# Altium PCB FLATSAT.PcbDoc (part 1 of 2)
Units mil, origin at the board's own origin, x right, y up, seen from the top; angles counter-clockwise.
Board outline 6000 x 4000 mil, 2 copper layers (Top Layer, Bottom Layer); 608 components, 657 nets, 2575 pads, 7 vias.
Unrouted connection lines stored in the file: 1377.
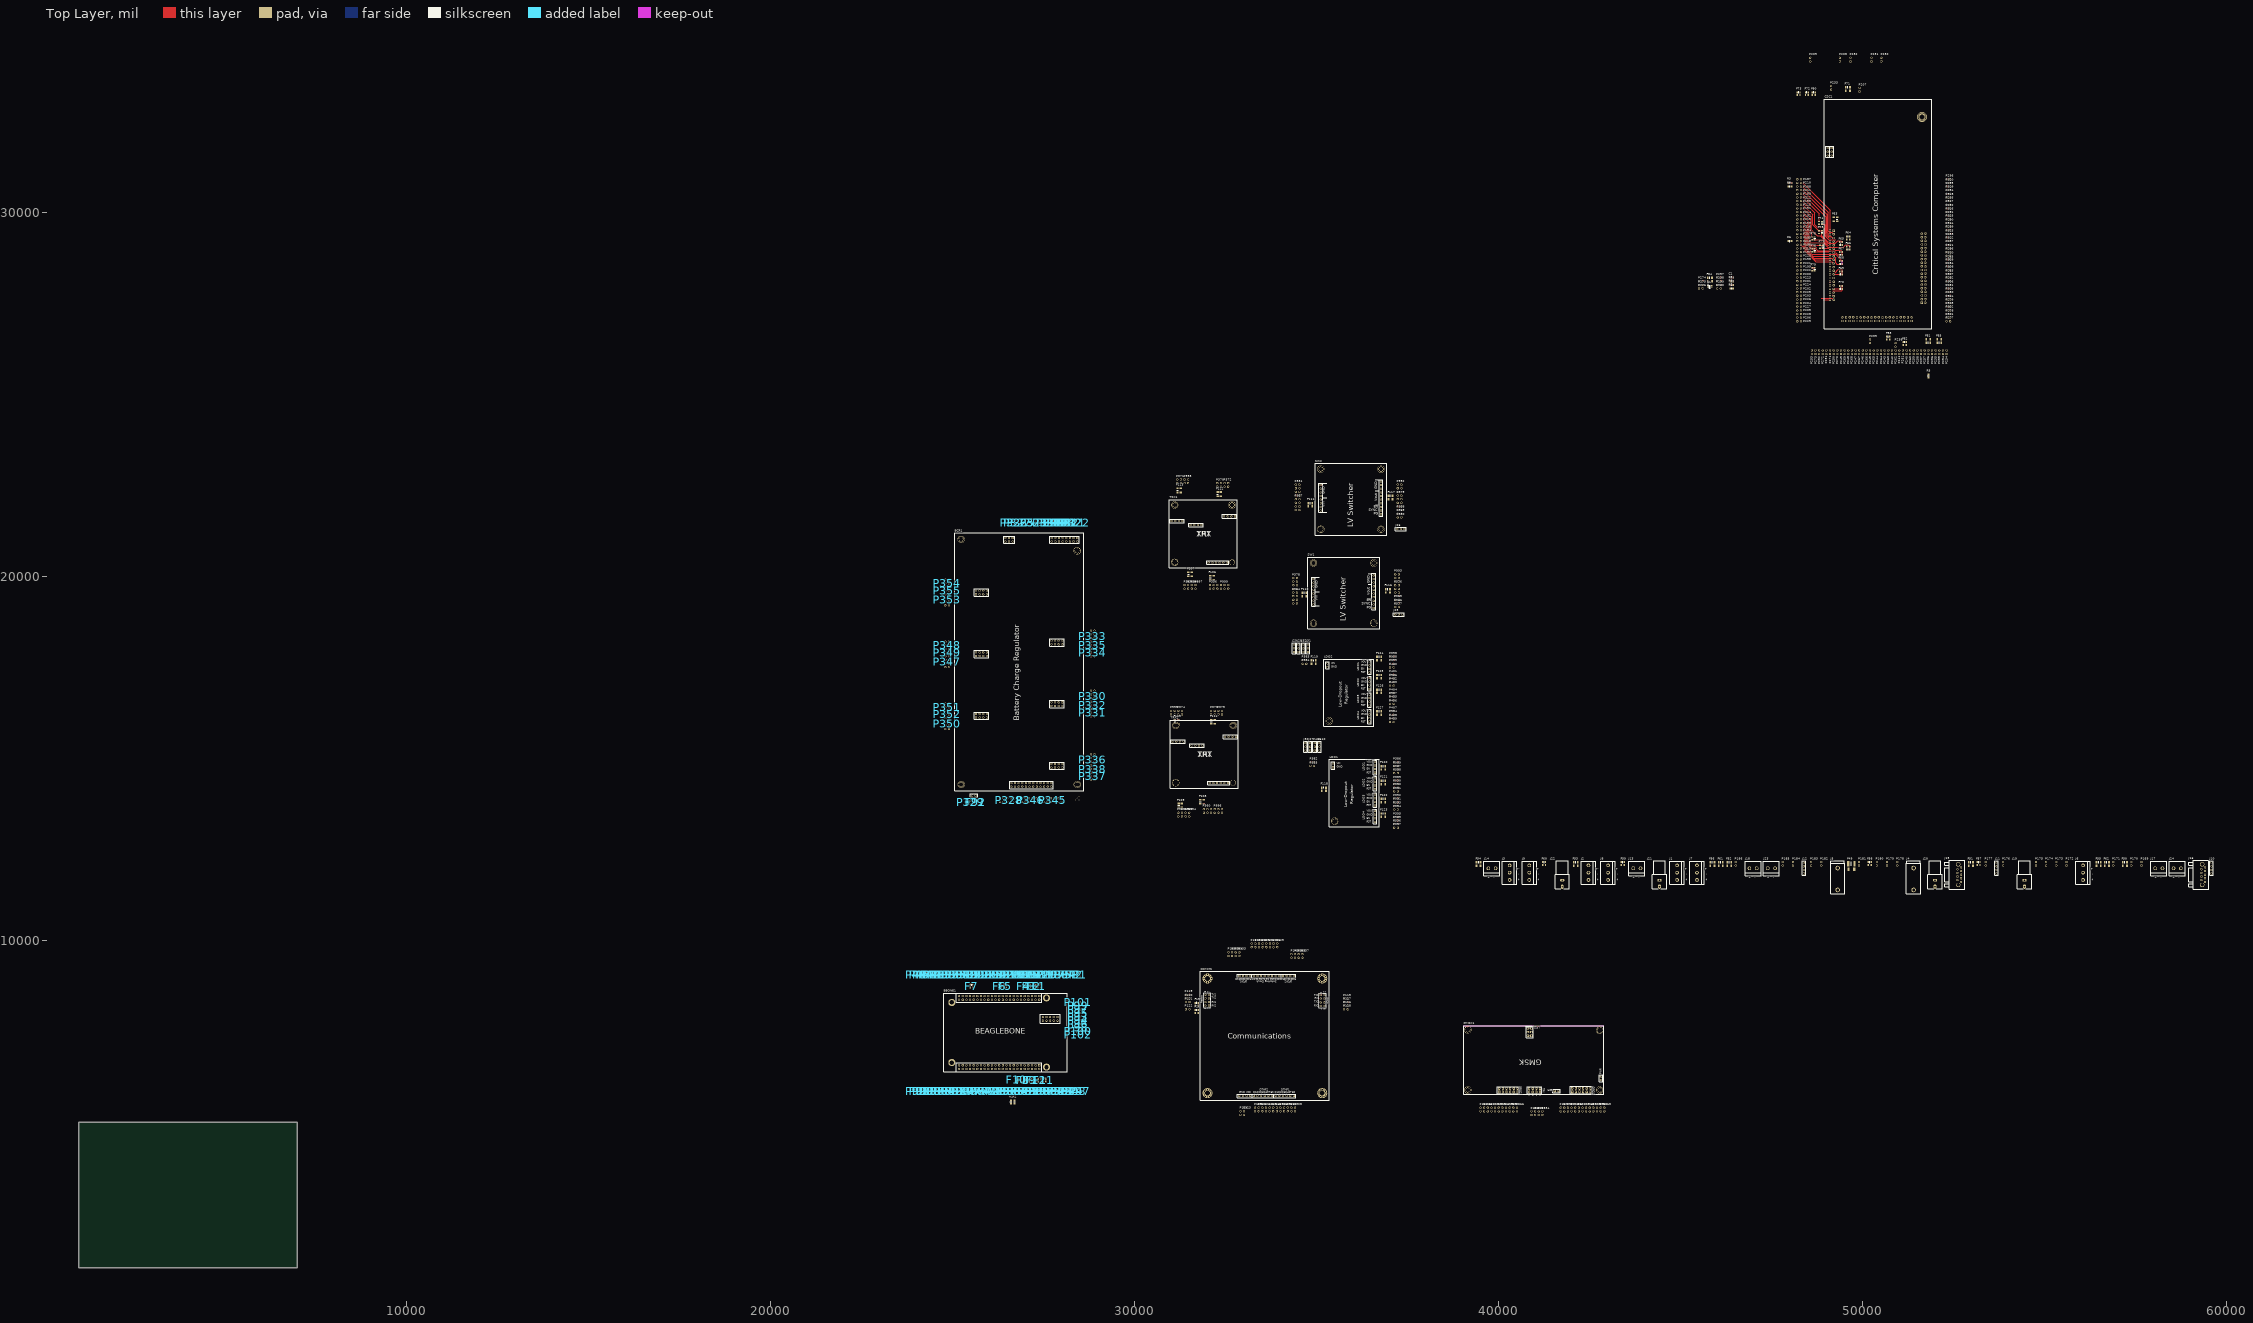
[diagram p0: Top Layer view]
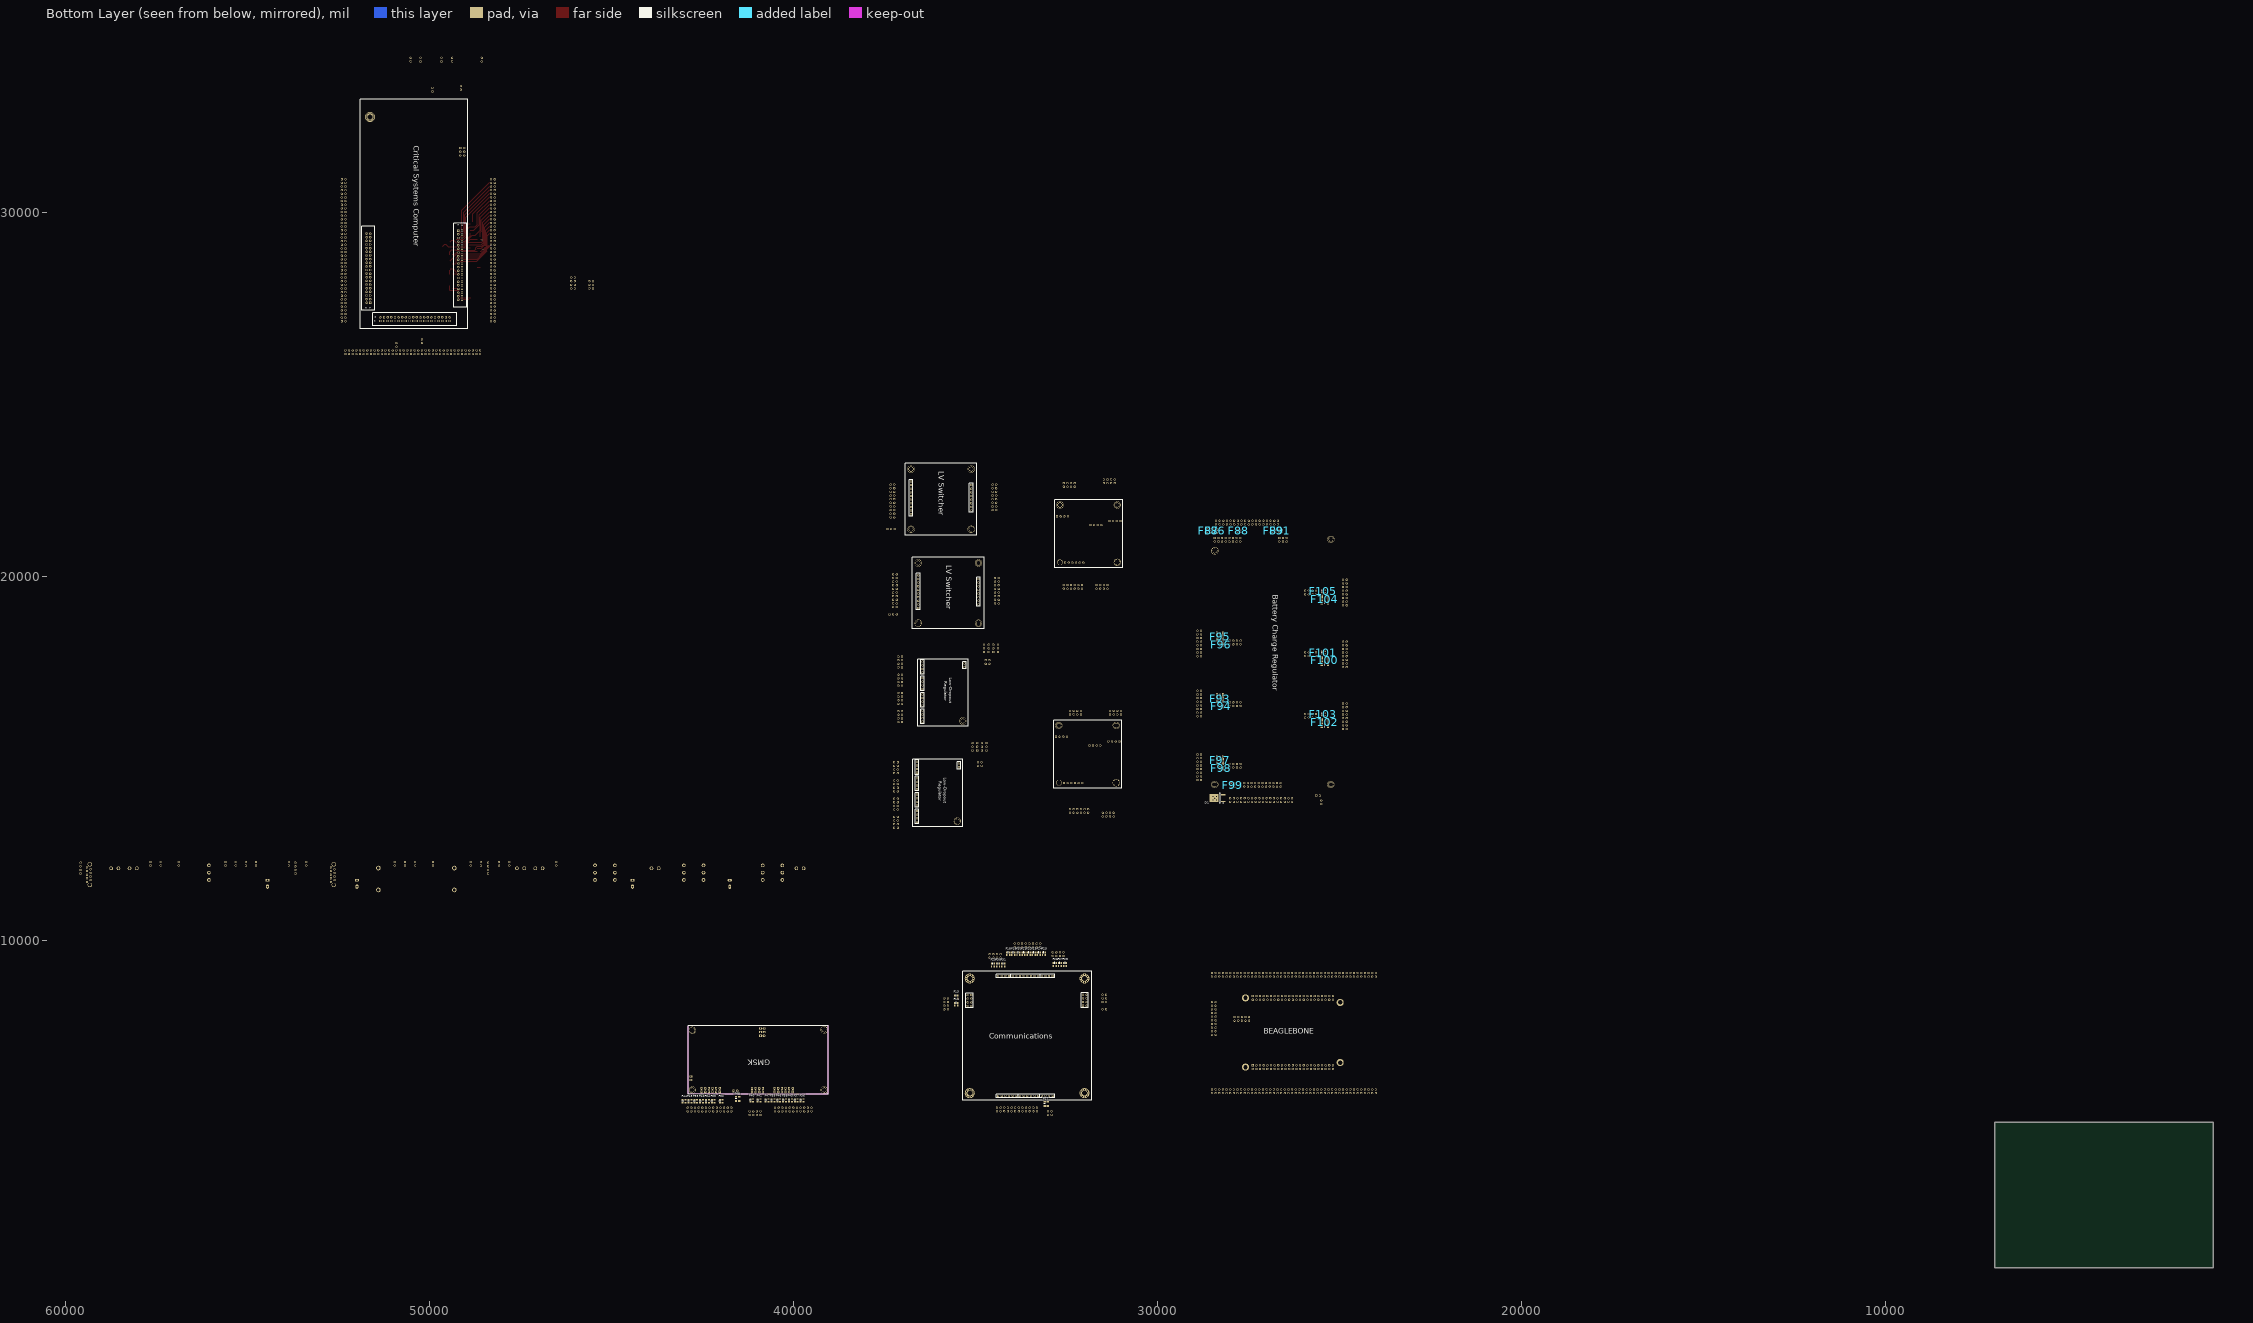
[diagram p1: Bottom Layer view, seen from below]

## Layer stack, top to bottom
Top Layer: signal copper 1.4
Dielectric: dielectric 12.6, FR-4, Dk 4.8
Bottom Layer: signal copper 1.4

## Board outline
1000,1000 7000,1000 7000,5000 1000,5000

## Design rules (kind name [scope] priority, off if disabled: settings)
Clearance [All] p1: gap=10
PolygonConnect [All] p1: connectstyle=Relief reliefconductorwidth=10 reliefentries=4 polygonreliefangle="90 Angle"
RoomDefinition CSC [InComponentClass('CSC')] p1: confinementstyle=ConfineIn formatcopy=TRUE lockcomponents=FALSE outline 43800,23200 54700,23200 54700,37600 43800,37600
RoomDefinition TRX2 [InComponentClass('TRX2')] p2: confinementstyle=ConfineIn formatcopy=TRUE lockcomponents=FALSE outline 30600,13100 33500,13100 33500,16800 30600,16800
RoomDefinition TRX1 [InComponentClass('TRX1')] p3: confinementstyle=ConfineIn formatcopy=TRUE lockcomponents=FALSE outline 30670.45,19454.29 33170.45,19454.29 33170.45,23054.29 30670.45,23054.29
RoomDefinition SW2 [InComponentClass('SW2')] p4: confinementstyle=ConfineIn formatcopy=TRUE lockcomponents=FALSE outline 34327.17,21013.35 37627.17,21013.35 37627.17,23313.35 34327.17,23313.35
RoomDefinition SW1 [InComponentClass('SW1')] p5: confinementstyle=ConfineIn formatcopy=TRUE lockcomponents=FALSE outline 34257.17,18449.61 37657.17,18449.61 37657.17,20849.61 34257.17,20849.61
RoomDefinition LDO2 [InComponentClass('LDO2')] p6: confinementstyle=ConfineIn formatcopy=TRUE lockcomponents=FALSE outline 34313.98,15691.26 37913.98,15691.26 37913.98,18191.26 34313.98,18191.26
RoomDefinition LDO1 [InComponentClass('LDO1')] p7: confinementstyle=ConfineIn formatcopy=TRUE lockcomponents=FALSE outline 34629.33,12887.72 37829.33,12887.72 37829.33,15487.72 34629.33,15487.72
RoomDefinition COMMSB [InComponentClass('COMMSB')] p8: confinementstyle=ConfineIn formatcopy=TRUE lockcomponents=FALSE outline 30806.42,4502.64 36606.42,4502.64 36606.42,10802.64 30806.42,10802.64
RoomDefinition GMSK [InComponentClass('GMSK')] p9: confinementstyle=ConfineIn formatcopy=TRUE lockcomponents=FALSE outline 44000,4500 44000,8500 37800,8500 37800,4500
RoomDefinition PWR_GEN [InComponentClass('PWR_GEN')] p10: confinementstyle=ConfineIn formatcopy=TRUE lockcomponents=FALSE outline 24195,12820 29595,12820 29595,22520 24195,22520
RoomDefinition CONNECTORS [InComponentClass('CONNECTORS')] p11: confinementstyle=ConfineIn formatcopy=TRUE lockcomponents=FALSE outline 39345,11270 59700,11270 59700,12290 39345,12290
RoomDefinition BBONE [InComponentClass('BBONE')] p12: confinementstyle=ConfineIn formatcopy=TRUE lockcomponents=FALSE outline 23650,5225 28860,5225 28860,9520 23650,9520
RoutingVias [All] p1: holewidth=28 width=50 viastyle="Through Hole" minholewidth=28 minwidth=50 maxholewidth=28 maxwidth=50
SilkscreenOverComponentPads [All] p1: minsilkscreentomaskgap=10
SolderMaskExpansion [All] p1: expansion=4
Width [All] p1: maxlimit=10 minlimit=10 preferedwidth=10
27 further rules are at their usual default settings.

## Classes and differential pairs
component class BBONE: BBONE1 F1 F2 F3 F4 F5 F6 F7 F8 F9 F10 F11 F12 P1 P2 P3 P4 P5 P6 P7 P8 P9 P10 P11 P12 P13 P14 P15 P16 P17 P18 P19 P20 P21 P22 P23 P24 P25 P26 P27 P28 P29 P30 P31 P32 P33 P34 P35 P36 P37 P38 P39 P40 P41 P42 P43 P44 P45 P46 P47 P48 P49 P50 P51 P52 P53 P54 P55 P56 P57 P58 P59 P60 P61 P62 P63 P64 P65 P66 P67 P68 P69 P70 P71 P72 P73 P74 P75 P76 P77 P78 P79 P80 P81 P82 P83 P84 P85 P86 P87 P88 P89 P90 P91 P92 P93 P94 P95 P96 P97 P98 P99 P100 P101 P102 R1 R2
component class CONNECTORS: F49 F50 F51 F52 F53 F54 F55 F56 F57 F58 F59 F60 F61 F62 J1 J2 J3 J4 J5 J6 J7 J8 J9 J10 J11 J12 J13 J14 J15 J16 J17 J18 J19 J20 J21 J22 J23 J24 P169 P170 P171 P172 P173 P174 P175 P176 P177 P178 P179 P180 P181 P182 P183 P184 P185 P186
component class CSC: C1 CSC1 F63 F64 F65 F66 F67 F68 F69 F70 F71 F72 F73 F74 F75 F76 F77 F78 F79 F80 F81 F82 F83 F84 F85 P187 P188 P189 P190 P191 P192 P193 P194 P195 P196 P197 P198 P199 P200 P201 P202 P203 P204 P205 P206 P207 P208 P209 P210 P211 P212 P213 P214 P215 P216 P217 P218 P219 P220 P221 P222 P223 P224 P225 P226 P227 P228 P229 P230 P231 P232 P233 P234 P235 P236 P237 P238 P239 P240 P241 P242 P243 P244 P245 P246 P247 P248 P249 P250 P251 P252 P253 P254 P255 P256 P257 P258 P259 P260 P261 P262 P263 P264 P265 P266 P267 P268 P269 P270 P271 P272 P273 P274 P275 P276 P277 P278 P279 P280 P281 P282 P283 P284 P285 P286 P287 P288 P289 P290 P291 P292 P293 P294 P295 P296 P297 P298 P299 P300 P301 P302 P303 P304 P305 P306 P307 P308 P309 P310 P311 P312 P313 P314 P315 P316 P317 P318 P319 P320 R3 R4 R5 R6 R7 R8 R9 U1
component class PWR_GEN: BCR1 D1 F86 F87 F88 F89 F91 F92 F93 F94 F95 F96 F97 F98 F99 F100 F101 F102 F103 F104 F105 P321 P322 P323 P324 P325 P326 P327 P328 P329 P330 P331 P332 P333 P334 P335 P336 P337 P338 P339 P340 P341 P342 P343 P344 P345 P346 P347 P348 P349 P350 P351 P352 P353 P354 P355
component class GMSK: F32 F33 F34 F35 F36 F37 F38 F39 F40 F41 F42 F43 F44 F45 F46 F47 F48 GMSK1 P141 P142 P143 P144 P145 P146 P147 P148 P149 P150 P151 P152 P153 P154 P155 P156 P157 P158 P159 P160 P161 P162 P163 P164 P165 P166 P167 P168
component class COMMSB: COMMS F13 F14 F15 F16 F17 F18 F19 F20 F21 F22 F23 F24 F25 F26 F27 F28 F29 F30 F31 P103 P104 P105 P106 P107 P108 P109 P110 P111 P112 P113 P114 P115 P116 P117 P118 P119 P120 P121 P122 P123 P124 P125 P126 P127 P128 P129 P130 P131 P132 P133 P134 P135 P136 P137 P138 P139 P140
component class LDO1: F118 F120 F121 F122 F123 J27 J30 LDO1 P382 P385 P386 P387 P388 P389 P390 P391 P392 P393 P394 P395 P396 P397 P410 P411 P985 P989 P990 P991
component class LDO2: F119 F124 F125 F126 F127 J28 J29 J31 J32 LDO2 P383 P384 P398 P399 P400 P401 P402 P403 P404 P405 P406 P407 P408 P409 P984 P986 P987 P988
component class SW1: F110 F116 J25 P364 P365 P366 P376 P377 P378 P993 SW1
component class SW2: F111 F117 J26 P367 P368 P369 P379 P380 P381 P992 SW2
component class TRX1: F106 F107 F112 F113 P356 P357 P358 P359 P370 P371 P372 P997 P998 P999 TRX1
component class TRX2: F108 F109 F114 F115 P360 P361 P362 P363 P373 P374 P375 P994 P995 P996 TRX2

## Components (designator, comment, footprint, x,y, rotation, side; value= is the part's Value field where it differs from the comment)
BBONE1 "Beagle_Bone" Beaglebone 24755,8540 r0 top
BCR1 "BCR" BCR 28600,14100 r90 top
C1 "0805 Cap" 6-0805_M 46400,28200 r180 top
COMMS "COMMS" Communications 31806.42,5602.64 r0 top
CSC1 "Critical Systems Computer" CSC 51900,26800 r90 top
D1 "50WQ03FN" TO229P990X238-3N 28350,13900 r0 bottom
F1 "Filter" Filter#1 27380,8700 r0 top
F2 "Filter" Filter#1 27240,8700 r0 top
F3 "Filter" Filter#1 27100,8700 r0 top
F4 "Filter" Filter#1 26960,8700 r0 top
F5 "Filter" Filter#1 26440,8700 r0 top
F6 "Filter" Filter#1 26300,8700 r0 top
F7 "Filter" Filter#1 25520,8700 r0 top
F8 "FilterPwr" FILTERPWR#1 26940,6200 r180 top
F9 "FilterPwr" FILTERPWR#1 27120,6200 r180 top
F10 "Filter" Filter#1 26760,6200 r180 top
F11 "FilterPwr" FILTERPWR#1 27500,6200 r180 top
F12 "FilterPwr" FILTERPWR#1 27300,6200 r180 top
F13 "Filter" Filter#1 35526.42,8402.64 r180 bottom
F14 "Filter" Filter#1 35526.42,8202.64 r180 bottom
F15 "Filter" Filter#1 31706.42,8202.64 r0 top
F16 "Filter" Filter#1 31706.42,8002.64 r0 top
F17 "FilterPwr" FILTERPWR#1 33006.42,5502.64 r90 bottom
F18 "Filter" Filter#1 34096.42,9587.64 r180 bottom
F19 "Filter" Filter#1 33956.42,9587.64 r180 bottom
F20 "Filter" Filter#1 33816.42,9587.64 r180 bottom
F21 "Filter" Filter#1 33676.42,9587.64 r180 bottom
F22 "Filter" Filter#1 33536.42,9587.64 r180 bottom
F23 "Filter" Filter#1 33396.42,9587.64 r180 bottom
F24 "Filter" Filter#1 33256.42,9587.64 r180 bottom
F25 "Filter" Filter#1 33116.42,9587.64 r180 bottom
F26 "Filter" Filter#1 32816.42,9297.64 r180 bottom
F27 "Filter" Filter#1 32676.42,9297.64 r180 bottom
F28 "Filter" Filter#1 32536.42,9297.64 r180 bottom
F29 "Filter" Filter#1 34516.42,9282.64 r180 bottom
F30 "Filter" Filter#1 34376.42,9282.64 r180 bottom
F31 "Filter" Filter#1 34236.42,9282.64 r180 bottom
F32 "Filter" Filter#1 41940,5580 r90 bottom
F33 "Filter" Filter#1 42160,5580 r90 bottom
F34 "Filter" Filter#1 42320,5580 r90 bottom
F35 "Filter" Filter#1 42640,5580 r90 bottom
F36 "Filter" Filter#1 39720,5600 r90 bottom
F37 "Filter" Filter#1 39880,5600 r90 bottom
F38 "Filter" Filter#1 40200,5600 r90 bottom
F39 "Filter" Filter#1 40520,5600 r90 bottom
F40 "Filter" Filter#1 41100,5600 r90 bottom
F41 "Filter" Filter#1 40900,5600 r90 bottom
F42 "Filter" Filter#1 42480,5580 r90 bottom
F43 "Filter" Filter#1 42800,5580 r90 bottom
F44 "Filter" Filter#1 42960,5580 r90 bottom
F45 "Filter" Filter#1 40040,5600 r90 bottom
F46 "Filter" Filter#1 40360,5600 r90 bottom
F47 "Filter" Filter#1 40680,5600 r90 bottom
F48 "FilterPwr" FILTERPWR#1 41480,5640 r90 bottom
F49 "FilterSola" FILTERSOLA 49685,11945 r0 top
F50 "FilterPwr" FILTERPWR#1 57200,12045 r0 top
F51 "FilterPwr" FILTERPWR#1 52970,12045 r0 top
F52 "FilterPwr" FILTERPWR#1 46335,12045 r0 top
F53 "FilterPwr" FILTERPWR#1 42115,12045 r0 top
F54 "FilterPwr" FILTERPWR#1 39445,12045 r0 top
F55 "FilterPwr" FILTERPWR#1 56475,12045 r0 top
F56 "FilterPwr" FILTERPWR#1 45870,12045 r0 top
F57 "Filter" Filter#1 53180,12065 r0 top
F58 "Filter" Filter#1 50190,12065 r0 top
F59 "Filter" Filter#1 43410,12065 r0 top
F60 "Filter" Filter#1 41245,12065 r0 top
F61 "FilterPwr" FILTERPWR#1 46100,12045 r0 top
F62 "FilterPwr" FILTERPWR#1 56705,12045 r0 top
F63 "FilterPwr" FILTERPWR#2 49200,29800 r270 top
F64 "Filter" Filter#2 49600,29250 r0 top
F65 "Filter" Filter#2 49400,29175 r180 top
F66 "Filter" Filter#2 49600,29050 r180 top
F67 "Filter" Filter#2 49400,28900 r180 top
F68 "Filter" Filter#2 49400,28650 r180 top
F69 "Filter" Filter#2 49400,28365 r180 top
F70 "Filter" Filter#2 49400,27970 r180 top
F71 "FilterPwr" FILTERPWR#2 49590,33330 r0 top
F72 "Filter" Filter#2 48465,33210 r0 top
F73 "Filter" Filter#2 48235,33210 r0 top
F74 "Filter" Filter#2 48800,29700 r270 top
F75 "Filter" Filter#2 48800,29450 r270 top
F76 "Filter" Filter#2 48600,29275 r270 top
F77 "Filter" Filter#2 48825,29050 r270 top
F78 "Filter" Filter#2 48600,28950 r270 top
F79 "Filter" Filter#2 48600,28427 r270 top
F80 "Filter" Filter#2 48650,33210 r0 top
F81 "FilterPwr" FILTERPWR#2 51800,26500 r180 top
F82 "Filter" Filter#2 51150,26350 r0 top
F83 "Filter" Filter#2 50700,26500 r0 top
F84 "FilterPwr" FILTERPWR#2 45800,28100 r0 top
F85 "FilterPwr" FILTERPWR#2 52100,26500 r180 top
F86 "FilterPwr" FILTERPWR#2 28460,21240 r270 bottom
F87 "FilterPwr" FILTERPWR#2 28640,21240 r270 bottom
F88 "Filter" Filter#2 27800,21240 r270 bottom
F89 "Filter" Filter#2 26840,21240 r270 bottom
F91 "Filter" Filter#2 26660,21240 r270 bottom
F92 "Filter" Filter#2 25630,13750 r0 top
F93 "FilterSola" FILTERSOLA 28280,16560 r180 bottom
F94 "Filter" Filter#2 28280,16420 r270 bottom
F95 "FilterSola" FILTERSOLA 28280,18260 r180 bottom
F96 "Filter" Filter#2 28280,18120 r270 bottom
F97 "FilterSola" FILTERSOLA 28280,14860 r180 bottom
F98 "Filter" Filter#2 28280,14720 r270 bottom
F99 "FilterPwr" FILTERPWR#2 27980,14260 r270 bottom
F100 "FilterSola" FILTERSOLA 25400,17760 r0 bottom
F101 "Filter" Filter#2 25400,17900 r90 bottom
F102 "FilterSola" FILTERSOLA 25400,16060 r0 bottom
F103 "Filter" Filter#2 25400,16200 r90 bottom
F104 "FilterSola" FILTERSOLA 25400,19440 r0 bottom
F105 "Filter" Filter#2 25400,19580 r90 bottom
F106 "FilterPwr" FILTERPWR#1 32170.45,19954.29 r90 top
F107 "FilterPwr" FILTERPWR#1 31570.45,20054.29 r90 top
F108 "FilterPwr" FILTERPWR#1 31900,13800 r90 top
F109 "FilterPwr" FILTERPWR#1 31300,13700 r90 top
F110 "FilterPwr" FILTERPWR#1 34657.17,19449.61 r0 top
F111 "FilterPwr" FILTERPWR#1 34827.17,21913.35 r0 top
F112 "FilterPwr" FILTERPWR#1 32370.45,22254.29 r90 top
F113 "FilterPwr" FILTERPWR#1 31270.45,22354.29 r90 top
F114 "FilterPwr" FILTERPWR#1 32200,16000 r90 top
F115 "FilterPwr" FILTERPWR#1 31200,16000 r90 top
F116 "FilterPwr" FILTERPWR#1 36957.17,19549.61 r0 top
F117 "FilterPwr" FILTERPWR#1 37027.17,22113.35 r0 top
F118 "FilterPwr" FILTERPWR#1 35200,14100 r0 top
F119 "FilterPwr" FILTERPWR#1 34913.98,17591.26 r0 top
F120 "FilterPwr" FILTERPWR#1 36829.33,14687.72 r0 top
F121 "FilterPwr" FILTERPWR#1 36829.33,14287.72 r0 top
F122 "FilterPwr" FILTERPWR#1 36829.33,13787.72 r0 top
F123 "FilterPwr" FILTERPWR#1 36829.33,13387.72 r0 top
F124 "FilterPwr" FILTERPWR#1 36713.98,17691.26 r0 top
F125 "FilterPwr" FILTERPWR#1 36713.98,17191.26 r0 top
F126 "FilterPwr" FILTERPWR#1 36713.98,16791.26 r0 top
F127 "FilterPwr" FILTERPWR#1 36713.98,16191.26 r0 top
GMSK1 "GMSK" GMSK 42890,7685 r180 top
J1 "X+" SCREW3 44900,11855 r90 top
J2 "Y+" SCREW3 42465,11855 r90 top
J3 "Z+" SCREW3 40300,11855 r90 top
J4 "VEXT+" 4MM_BANANA 51395,11380 r90 top
J5 "VEXT-" 4MM_BANANA 49310,11380 r90 top
J6 "BATT" SCREW3 56050,11855 r90 top
J7 "X-" SCREW3 45445,11855 r90 top
J8 "Y-" SCREW3 43005,11855 r90 top
J9 "Z-" SCREW3 40840,11855 r90 top
J10 "TELEM_BUS" HDR1X4 59575,11830 r90 top
J11 "PAYLOAD_BUS" HDR1X4 53675,11830 r90 top
J12 "PAYLOAD_SLAVE_BUS" HDR1X4 48380,11830 r90 top
J13 "3V0_AUX" SCREW2 43795,11975 r0 top
J14 "5V0_AUX" SCREW2 39815,11975 r0 top
J15 "UMBILICAL1" "MICROMINIATURE D9" 52700,11800 r90 top
J16 "UMBILICAL2" "MICROMINIATURE D9" 59400,11800 r90 top
J17 "TX1" SCREW2 58130,11975 r0 top
J18 "RX1" SCREW2 46985,11975 r0 top
J19 "RCA" RCA/4.5-H2 54440,11805 r90 top
J20 "RCA" RCA/4.5-H2 51985,11805 r90 top
J21 "RCA" RCA/4.5-H2 44415,11805 r90 top
J22 "RCA" RCA/4.5-H2 41745,11805 r90 top
J23 "RX2" SCREW2 47490,11975 r0 top
J24 "TX2" SCREW2 58635,11975 r0 top
J25 "SW1_EN" HDR1X3 37357.17,18949.61 r180 top
J26 "SW2_EN" HDR1X3 37413.19,21292.09 r180 top
J27 "PWR_EN" HDR1X3 34821.14,15213.78 r90 top
J28 "BCR_EN" HDR1X3 34505.79,17917.32 r90 top
J29 "TELEM_EN" HDR1X3 34377.91,17917.32 r90 top
J30 "CSC_EN" HDR1X3 34693.27,15213.78 r90 top
J31 "BBONE_EN" HDR1X3 34761.54,17917.32 r90 top
J32 "5V0_AUX_EN" HDR1X3 34633.66,17917.32 r90 top
LDO1 "3V3" LDO 35350,13120 r0 top
LDO2 "5V0" LDO 35200,15870 r0 top
P1 "Jumper" Jumper 28500,9000 r90 top
P2 "Jumper" Jumper 28400,9000 r90 top
P3 "Jumper" Jumper 28300,9000 r90 top
P4 "Jumper" Jumper 28200,9000 r90 top
P5 "Jumper" Jumper 28100,9000 r90 top
P6 "Jumper" Jumper 28000,9000 r90 top
P7 "Jumper" Jumper 27900,9000 r90 top
P8 "Jumper" Jumper 27800,9000 r90 top
P9 "Jumper" Jumper 27700,9000 r90 top
P10 "Jumper" Jumper 27600,9000 r90 top
P11 "Jumper" Jumper 27500,9000 r90 top
P12 "Jumper" Jumper 27400,9000 r90 top
P13 "Jumper" Jumper 27300,9000 r90 top
P14 "Jumper" Jumper 27200,9000 r90 top
P15 "Jumper" Jumper 27100,9000 r90 top
P16 "Jumper" Jumper 27000,9000 r90 top
P17 "Jumper" Jumper 26900,9000 r90 top
P18 "Jumper" Jumper 26800,9000 r90 top
P19 "Jumper" Jumper 26700,9000 r90 top
P20 "Jumper" Jumper 26600,9000 r90 top
P21 "Jumper" Jumper 26500,9000 r90 top
P22 "Jumper" Jumper 26400,9000 r90 top
P23 "Jumper" Jumper 26300,9000 r90 top
P24 "Jumper" Jumper 26200,9000 r90 top
P25 "Jumper" Jumper 26100,9000 r90 top
P26 "Jumper" Jumper 26000,9000 r90 top
P27 "Jumper" Jumper 25900,9100 r270 top
P28 "Jumper" Jumper 25800,9100 r270 top
P29 "Jumper" Jumper 25700,9100 r270 top
P30 "Jumper" Jumper 25600,9100 r270 top
P31 "Jumper" Jumper 25500,9100 r270 top
P32 "Jumper" Jumper 25400,9100 r270 top
P33 "Jumper" Jumper 25300,9100 r270 top
P34 "Jumper" Jumper 25200,9100 r270 top
P35 "Jumper" Jumper 25100,9100 r270 top
P36 "Jumper" Jumper 25000,9100 r270 top
P37 "Jumper" Jumper 24900,9100 r270 top
P38 "Jumper" Jumper 24800,9100 r270 top
P39 "Jumper" Jumper 24700,9100 r270 top
P40 "Jumper" Jumper 24600,9100 r270 top
P41 "Jumper" Jumper 24500,9100 r270 top
P42 "Jumper" Jumper 24400,9100 r270 top
P43 "Jumper" Jumper 24300,9100 r270 top
P44 "Jumper" Jumper 24200,9100 r270 top
P45 "Jumper" Jumper 24100,9100 r270 top
P46 "Jumper" Jumper 24000,9100 r270 top
P47 "Jumper" Jumper 28500,5800 r90 top
P48 "Jumper" Jumper 28400,5800 r90 top
P49 "Jumper" Jumper 28300,5800 r90 top
P50 "Jumper" Jumper 28200,5800 r90 top
P51 "Jumper" Jumper 28100,5800 r90 top
P52 "Jumper" Jumper 28000,5800 r90 top
P53 "Jumper" Jumper 27900,5800 r90 top
P54 "Jumper" Jumper 27800,5800 r90 top
P55 "Jumper" Jumper 27700,5800 r90 top
P56 "Jumper" Jumper 27600,5800 r90 top
P57 "Jumper" Jumper 27500,5800 r90 top
P58 "Jumper" Jumper 27400,5800 r90 top
P59 "Jumper" Jumper 27300,5800 r90 top
P60 "Jumper" Jumper 27200,5800 r90 top
P61 "Jumper" Jumper 27100,5800 r90 top
P62 "Jumper" Jumper 27000,5800 r90 top
P63 "Jumper" Jumper 26900,5800 r90 top
P64 "Jumper" Jumper 26800,5800 r90 top
P65 "Jumper" Jumper 26700,5800 r90 top
P66 "Jumper" Jumper 26600,5800 r90 top
P67 "Jumper" Jumper 26500,5800 r90 top
P68 "Jumper" Jumper 26400,5800 r90 top
P69 "Jumper" Jumper 26300,5800 r90 top
P70 "Jumper" Jumper 26200,5800 r90 top
P71 "Jumper" Jumper 26100,5800 r90 top
P72 "Jumper" Jumper 26000,5800 r90 top
P73 "Jumper" Jumper 25900,5800 r90 top
P74 "Jumper" Jumper 25800,5800 r90 top
P75 "Jumper" Jumper 25700,5800 r90 top
P76 "Jumper" Jumper 25600,5800 r90 top
P77 "Jumper" Jumper 25500,5800 r90 top
P78 "Jumper" Jumper 25400,5800 r90 top
P79 "Jumper" Jumper 25300,5800 r90 top
P80 "Jumper" Jumper 25200,5800 r90 top
P81 "Jumper" Jumper 25100,5800 r90 top
P82 "Jumper" Jumper 25000,5800 r90 top
P83 "Jumper" Jumper 24900,5800 r90 top
P84 "Jumper" Jumper 24800,5800 r90 top
P85 "Jumper" Jumper 24700,5800 r90 top
P86 "Jumper" Jumper 24600,5800 r90 top
P87 "Jumper" Jumper 24500,5800 r90 top
P88 "Jumper" Jumper 24400,5800 r90 top
P89 "Jumper" Jumper 24300,5800 r90 top
P90 "Jumper" Jumper 24200,5800 r90 top
P91 "Jumper" Jumper 24100,5800 r90 top
P92 "Jumper" Jumper 24000,5800 r90 top
P93 "Jumper" Jumper 28500,7900 r180 top
P94 "Jumper" Jumper 28500,7800 r180 top
P95 "Jumper" Jumper 28500,8000 r180 top
P96 "Jumper" Jumper 28500,7700 r180 top
P97 "Jumper" Jumper 28500,8100 r180 top
P98 "Jumper" Jumper 28500,7600 r180 top
P99 "Jumper" Jumper 28500,8200 r180 top
P100 "Jumper" Jumper 28500,7500 r180 top
P101 "Jumper" Jumper 28500,8300 r180 top
P102 "Jumper" Jumper 28500,7400 r180 top
P103 "Jumper" Jumper 33906.42,5302.64 r90 top
P104 "Jumper" Jumper 34006.42,5302.64 r90 top
P105 "Jumper" Jumper 34106.42,5302.64 r90 top
P106 "Jumper" Jumper 34206.42,5302.64 r90 top
P107 "Jumper" Jumper 34306.42,5402.64 r270 top
P108 "Jumper" Jumper 34406.42,5302.64 r90 top
P109 "Jumper" Jumper 33306.42,5302.64 r90 top
P110 "Jumper" Jumper 33406.42,5302.64 r90 top
P111 "Jumper" Jumper 33506.42,5302.64 r90 top
P112 "Jumper" Jumper 33606.42,5302.64 r90 top
P113 "Jumper" Jumper 33706.42,5302.64 r90 top
P114 "Jumper" Jumper 33806.42,5302.64 r90 top
P115 "Jumper" Jumper 35851.42,8402.64 r180 top
P116 "Jumper" Jumper 35851.42,8202.64 r180 top
P117 "Jumper" Jumper 35851.42,8302.64 r180 top
P118 "Jumper" Jumper 35851.42,8102.64 r180 top
P119 "Jumper" Jumper 31406.42,8502.64 r0 top
P120 "Jumper" Jumper 31406.42,8402.64 r0 top
P121 "Jumper" Jumper 31406.42,8302.64 r0 top
P122 "Jumper" Jumper 31406.42,8102.64 r0 top
P123 "Jumper" Jumper 33006.42,5202.64 r90 top
P124 "Jumper" Jumper 32906.42,5202.64 r90 top
P125 "Jumper" Jumper 33916.42,9807.64 r90 top
P126 "Jumper" Jumper 33816.42,9807.64 r90 top
P127 "Jumper" Jumper 33716.42,9807.64 r90 top
P128 "Jumper" Jumper 33616.42,9807.64 r90 top
P129 "Jumper" Jumper 33516.42,9807.64 r90 top
P130 "Jumper" Jumper 33416.42,9807.64 r90 top
P131 "Jumper" Jumper 33316.42,9807.64 r90 top
P132 "Jumper" Jumper 33216.42,9807.64 r90 top
P133 "Jumper" Jumper 32876.42,9567.64 r90 top
P134 "Jumper" Jumper 32776.42,9567.64 r90 top
P135 "Jumper" Jumper 32676.42,9567.64 r90 top
P136 "Jumper" Jumper 32576.42,9567.64 r90 top
P137 "Jumper" Jumper 34606.42,9517.64 r90 top
P138 "Jumper" Jumper 34506.42,9517.64 r90 top
P139 "Jumper" Jumper 34406.42,9517.64 r90 top
P140 "Jumper" Jumper 34306.42,9517.64 r90 top
P141 "Jumper" Jumper 42000,5300 r90 top
P142 "Jumper" Jumper 42200,5300 r90 top
P143 "Jumper" Jumper 42300,5300 r90 top
P144 "Jumper" Jumper 42400,5300 r90 top
P145 "Jumper" Jumper 42600,5300 r90 top
P146 "Jumper" Jumper 39600,5300 r90 top
P147 "Jumper" Jumper 39800,5300 r90 top
P148 "Jumper" Jumper 40000,5300 r90 top
P149 "Jumper" Jumper 40200,5300 r90 top
P150 "Jumper" Jumper 40400,5300 r90 top
P151 "Jumper" Jumper 40900,5200 r90 top
P152 "Jumper" Jumper 41000,5200 r90 top
P153 "Jumper" Jumper 41100,5200 r90 top
P154 "Jumper" Jumper 41200,5200 r90 top
P155 "Jumper" Jumper 41800,5400 r270 top
P156 "Jumper" Jumper 42100,5400 r270 top
P157 "Jumper" Jumper 41900,5400 r270 top
P158 "Jumper" Jumper 42500,5400 r270 top
P159 "Jumper" Jumper 42700,5400 r270 top
P160 "Jumper" Jumper 42800,5400 r270 top
P161 "Jumper" Jumper 39500,5400 r270 top
P162 "Jumper" Jumper 39700,5400 r270 top
P163 "Jumper" Jumper 39900,5400 r270 top
P164 "Jumper" Jumper 40100,5400 r270 top
P165 "Jumper" Jumper 40300,5400 r270 top
P166 "Jumper" Jumper 40500,5400 r270 top
P167 "Jumper" Jumper 41700,5400 r270 top
P168 "Jumper" Jumper 42900,5300 r90 top
P169 "Jumper" Jumper 57655,12050 r90 top
P170 "Jumper" Jumper 57375,12050 r90 top
P171 "Jumper" Jumper 56880,12050 r90 top
P172 "Jumper" Jumper 55595,12050 r90 top
P173 "Jumper" Jumper 55315,12050 r90 top
P174 "Jumper" Jumper 55035,12050 r90 top
P175 "Jumper" Jumper 54755,12050 r90 top
P176 "Jumper" Jumper 53855,12050 r90 top
P177 "Jumper" Jumper 53375,12050 r90 top
P178 "Jumper" Jumper 50945,12050 r90 top
P179 "Jumper" Jumper 50665,12050 r90 top
P180 "Jumper" Jumper 50385,12050 r90 top
P181 "Jumper" Jumper 49895,12050 r90 top
P182 "Jumper" Jumper 48860,12050 r90 top
P183 "Jumper" Jumper 48580,12050 r90 top
P184 "Jumper" Jumper 48080,12050 r90 top
P185 "Jumper" Jumper 47800,12050 r90 top
P186 "Jumper" Jumper 46510,12050 r90 top
P187 "Jumper" Jumper 48200,30900 r0 top
P188 "Jumper" Jumper 48200,30700 r0 top
P189 "Jumper" Jumper 48200,30500 r0 top
P190 "Jumper" Jumper 48200,30300 r0 top
P191 "Jumper" Jumper 48200,30100 r0 top
P192 "Jumper" Jumper 48200,29900 r0 top
P193 "Jumper" Jumper 48200,29700 r0 top
P194 "Jumper" Jumper 48200,29500 r0 top
P195 "Jumper" Jumper 48200,29300 r0 top
P196 "Jumper" Jumper 48200,29100 r0 top
P197 "Jumper" Jumper 48200,28900 r0 top
P198 "Jumper" Jumper 48200,28700 r0 top
P199 "Jumper" Jumper 48200,28500 r0 top
P200 "Jumper" Jumper 48200,28300 r0 top
P201 "Jumper" Jumper 48200,28100 r0 top
P202 "Jumper" Jumper 48200,27900 r0 top
P203 "Jumper" Jumper 48200,27700 r0 top
P204 "Jumper" Jumper 48200,27500 r0 top
P205 "Jumper" Jumper 48200,27300 r0 top
P206 "Jumper" Jumper 48200,27100 r0 top
P207 "Jumper" Jumper 49910,33310 r90 top
P208 "Jumper" Jumper 49370,34135 r90 top
P209 "Jumper" Jumper 48555,34135 r90 top
P210 "Jumper" Jumper 48300,30800 r180 top
P211 "Jumper" Jumper 48300,30600 r180 top
P212 "Jumper" Jumper 48300,30400 r180 top
P213 "Jumper" Jumper 48300,30200 r180 top
P214 "Jumper" Jumper 48300,30000 r180 top
P215 "Jumper" Jumper 48300,29800 r180 top
P216 "Jumper" Jumper 48300,29600 r180 top
P217 "Jumper" Jumper 48300,29400 r180 top
P218 "Jumper" Jumper 48300,29200 r180 top
P219 "Jumper" Jumper 48300,29000 r180 top
P220 "Jumper" Jumper 48300,28800 r180 top
P221 "Jumper" Jumper 48300,28600 r180 top
P222 "Jumper" Jumper 48300,28400 r180 top
P223 "Jumper" Jumper 48300,28200 r180 top
P224 "Jumper" Jumper 48300,28000 r180 top
P225 "Jumper" Jumper 48300,27800 r180 top
P226 "Jumper" Jumper 48300,27600 r180 top
P227 "Jumper" Jumper 48300,27400 r180 top
P228 "Jumper" Jumper 48300,27200 r180 top
P229 "Jumper" Jumper 48300,27000 r180 top
P230 "Jumper" Jumper 50510,34135 r90 top
P231 "Jumper" Jumper 50240,34135 r90 top
P232 "Jumper" Jumper 49660,34135 r90 top
P233 "Jumper" Jumper 49130,33360 r90 top
P234 "Jumper" Jumper 52300,26200 r270 top
P235 "Jumper" Jumper 52000,26100 r90 top
P236 "Jumper" Jumper 51800,26100 r90 top
P237 "Jumper" Jumper 51600,26100 r90 top
P238 "Jumper" Jumper 50900,26300 r90 top
P239 "Jumper" Jumper 50200,26400 r90 top
P240 "Jumper" Jumper 51200,26100 r90 top
P241 "Jumper" Jumper 51000,26100 r90 top
P242 "Jumper" Jumper 50800,26100 r90 top
P243 "Jumper" Jumper 50600,26100 r90 top
P244 "Jumper" Jumper 50400,26100 r90 top
P245 "Jumper" Jumper 50200,26100 r90 top
P246 "Jumper" Jumper 50000,26100 r90 top
P247 "Jumper" Jumper 49800,26100 r90 top
P248 "Jumper" Jumper 49600,26100 r90 top
P249 "Jumper" Jumper 49400,26100 r90 top
P250 "Jumper" Jumper 49200,26100 r90 top
P251 "Jumper" Jumper 49000,26100 r90 top
P252 "Jumper" Jumper 48800,26100 r90 top
P253 "Jumper" Jumper 48600,26100 r90 top
P254 "Jumper" Jumper 52200,26200 r270 top
P255 "Jumper" Jumper 52100,26200 r270 top
P256 "Jumper" Jumper 51900,26200 r270 top
P257 "Jumper" Jumper 51700,26200 r270 top
P258 "Jumper" Jumper 51500,26200 r270 top
P259 "Jumper" Jumper 51400,26200 r270 top
P260 "Jumper" Jumper 51300,26200 r270 top
P261 "Jumper" Jumper 51100,26200 r270 top
P262 "Jumper" Jumper 50900,26100 r90 top
P263 "Jumper" Jumper 50700,26200 r270 top
P264 "Jumper" Jumper 50500,26200 r270 top
P265 "Jumper" Jumper 50300,26200 r270 top
P266 "Jumper" Jumper 50100,26200 r270 top
P267 "Jumper" Jumper 49900,26200 r270 top
P268 "Jumper" Jumper 49700,26200 r270 top
P269 "Jumper" Jumper 49500,26200 r270 top
P270 "Jumper" Jumper 49300,26200 r270 top
P271 "Jumper" Jumper 49100,26200 r270 top
P272 "Jumper" Jumper 48900,26200 r270 top
P273 "Jumper" Jumper 48700,26100 r90 top
P274 "Jumper" Jumper 45600,28100 r180 top
P275 "Jumper" Jumper 45600,28000 r180 top
P276 "Jumper" Jumper 45500,27900 r0 top
P277 "Jumper" Jumper 52400,27000 r180 top
P278 "Jumper" Jumper 52400,27200 r180 top
P279 "Jumper" Jumper 52400,27500 r180 top
P280 "Jumper" Jumper 52400,27700 r180 top
P281 "Jumper" Jumper 52400,27900 r180 top
P282 "Jumper" Jumper 52400,28100 r180 top
P283 "Jumper" Jumper 52400,28300 r180 top
P284 "Jumper" Jumper 52400,28500 r180 top
P285 "Jumper" Jumper 52400,28700 r180 top
P286 "Jumper" Jumper 52400,28900 r180 top
P287 "Jumper" Jumper 52400,29100 r180 top
P288 "Jumper" Jumper 52400,29300 r180 top
P289 "Jumper" Jumper 52400,29500 r180 top
P290 "Jumper" Jumper 52400,29700 r180 top
P291 "Jumper" Jumper 52400,29900 r180 top
P292 "Jumper" Jumper 52400,30100 r180 top
P293 "Jumper" Jumper 52400,30300 r180 top
P294 "Jumper" Jumper 52400,30500 r180 top
P295 "Jumper" Jumper 52400,30700 r180 top
P296 "Jumper" Jumper 52400,30900 r180 top
P297 "Jumper" Jumper 46000,28200 r0 top
P298 "Jumper" Jumper 46000,28100 r0 top
P299 "Jumper" Jumper 46000,28000 r0 top
P300 "Jumper" Jumper 46000,27900 r0 top
P301 "Jumper" Jumper 52300,27100 r0 top
P302 "Jumper" Jumper 52300,27300 r0 top
P303 "Jumper" Jumper 52300,27400 r0 top
P304 "Jumper" Jumper 52300,27600 r0 top
P305 "Jumper" Jumper 52300,27800 r0 top
P306 "Jumper" Jumper 52300,28000 r0 top
P307 "Jumper" Jumper 52300,28200 r0 top
P308 "Jumper" Jumper 52300,28400 r0 top
P309 "Jumper" Jumper 52300,28600 r0 top
P310 "Jumper" Jumper 52300,28800 r0 top
P311 "Jumper" Jumper 52300,29000 r0 top
P312 "Jumper" Jumper 52300,29200 r0 top
P313 "Jumper" Jumper 52300,29400 r0 top
P314 "Jumper" Jumper 52300,29600 r0 top
P315 "Jumper" Jumper 52300,29800 r0 top
P316 "Jumper" Jumper 52300,30000 r0 top
P317 "Jumper" Jumper 52300,30200 r0 top
P318 "Jumper" Jumper 52300,30400 r0 top
P319 "Jumper" Jumper 52300,30600 r0 top
P320 "Jumper" Jumper 52300,30800 r0 top
P321 "Jumper" Jumper 28290,21520 r270 top
P322 "Jumper" Jumper 28390,21520 r270 top
P323 "Jumper" JUMPER6 26990,21420 r90 top
P324 "Jumper" Jumper 27590,21520 r270 top
P325 "Jumper" Jumper 26890,21520 r270 top
P326 "Jumper" Jumper 26690,21520 r270 top
P327 "Jumper" Jumper 26790,21520 r270 top
P328 "Jumper" JUMPER6 26300,13800 r90 top
P329 "Jumper" Jumper 25500,13740 r90 top
P330 "Jumper" JUMPER4 28900,16550 r180 top
P331 "Jumper" Jumper3 28900,16150 r180 top
P332 "Jumper" Jumper 28900,16450 r180 top
P333 "Jumper" JUMPER4 28900,18200 r180 top
P334 "Jumper" Jumper3 28900,17800 r180 top
P335 "Jumper" Jumper 28900,18100 r180 top
P336 "Jumper" JUMPER4 28900,14800 r180 top
P337 "Jumper" Jumper3 28900,14400 r180 top
P338 "Jumper" Jumper 28900,14700 r180 top
P339 "Jumper" Jumper 27890,21420 r90 top
P340 "Jumper" Jumper 27990,21420 r90 top
P341 "Jumper" Jumper 28090,21420 r90 top
P342 "Jumper" Jumper 28190,21420 r90 top
P343 "Jumper" Jumper 27790,21420 r90 top
P344 "Jumper" Jumper 27690,21420 r90 top
P345 "Jumper" JUMPER6 28000,13900 r270 top
P346 "Jumper" JUMPER6 27400,13900 r270 top
P347 "Jumper" JUMPER4 24900,17500 r180 top
P348 "Jumper" Jumper3 24900,18000 r180 top
P349 "Jumper" Jumper 24900,17900 r180 top
P350 "Jumper" JUMPER4 24900,15800 r180 top
P351 "Jumper" Jumper3 24900,16300 r180 top
P352 "Jumper" Jumper 24900,16200 r180 top
P353 "Jumper" JUMPER4 24900,19200 r180 top
P354 "Jumper" Jumper3 24900,19700 r180 top
P355 "Jumper" Jumper 24900,19600 r180 top
P356 "Jumper" Jumper3 32070.45,19654.29 r90 top
P357 "Jumper" Jumper 31370.45,19754.29 r270 top
P358 "Jumper" Jumper 31570.45,19654.29 r90 top
P359 "Jumper" Jumper 31470.45,19654.29 r90 top
P360 "Jumper" Jumper3 31900,13500 r90 top
P361 "Jumper" Jumper 31200,13500 r270 top
P362 "Jumper" Jumper 31400,13400 r90 top
P363 "Jumper" Jumper 31300,13400 r90 top
P364 "Jumper3" JUMPER4 34357.17,19549.61 r0 top
P365 "Jumper" Jumper 37257.17,19349.61 r180 top
P366 "Jumper" Jumper 37257.17,19249.61 r180 top
P367 "Jumper3" JUMPER4 34427.17,22113.35 r0 top
P368 "Jumper" Jumper 37327.17,21813.35 r180 top
P369 "Jumper" Jumper 37227.17,21713.35 r0 top
P370 "Jumper" Jumper2 32270.45,22454.29 r90 top
P371 "Jumper" Jumper2 31170.45,22554.29 r90 top
P372 "Jumper" Jumper2 32470.45,22454.29 r90 top
P373 "Jumper" Jumper2 32100,16200 r90 top
P374 "Jumper" Jumper2 31200,16200 r90 top
P375 "Jumper" Jumper2 32300,16200 r90 top
P376 "Jumper3" JUMPER4 37157.17,19749.61 r0 top
P377 "Jumper" Jumper 37257.17,19149.61 r180 top
P378 "Jumper3" JUMPER4 34357.17,19949.61 r0 top
P379 "Jumper3" JUMPER4 37227.17,22213.35 r0 top
P380 "Jumper" Jumper 37227.17,21613.35 r0 top
P381 "Jumper3" JUMPER4 34427.17,22513.35 r0 top
P382 "Jumper" Jumper 34829.33,14887.72 r0 top
P383 "Jumper" Jumper 34713.98,17691.26 r180 top
P384 "Jumper" Jumper 34613.98,17591.26 r0 top
P385 "Jumper" Jumper 34829.33,14787.72 r0 top
P386 "Jumper" Jumper 37129.33,14887.72 r0 top
P387 "Jumper" Jumper 37129.33,14687.72 r0 top
P388 "Jumper" Jumper 37229.33,14587.72 r180 top
P389 "Jumper" Jumper 37129.33,14387.72 r0 top
P390 "Jumper" Jumper 37129.33,14187.72 r0 top
P391 "Jumper" Jumper 37129.33,14087.72 r0 top
P392 "Jumper" Jumper 37129.33,13887.72 r0 top
P393 "Jumper" Jumper 37129.33,13687.72 r0 top
P394 "Jumper" Jumper 37129.33,13587.72 r0 top
P395 "Jumper" Jumper 37129.33,13387.72 r0 top
P396 "Jumper" Jumper 37129.33,13187.72 r0 top
P397 "Jumper" Jumper 37129.33,13087.72 r0 top
P398 "Jumper" Jumper 37013.98,17791.26 r0 top
P399 "Jumper" Jumper 37013.98,17591.26 r0 top
P400 "Jumper" Jumper 37013.98,17491.26 r0 top
P401 "Jumper" Jumper 37013.98,17291.26 r0 top
P402 "Jumper" Jumper 37013.98,17091.26 r0 top
P403 "Jumper" Jumper 37013.98,16991.26 r0 top
P404 "Jumper" Jumper 37013.98,16791.26 r0 top
P405 "Jumper" Jumper 37013.98,16591.26 r0 top
P406 "Jumper" Jumper 37013.98,16491.26 r0 top
P407 "Jumper" Jumper 37013.98,16291.26 r0 top
P408 "Jumper" Jumper 37013.98,16091.26 r0 top
P409 "Jumper" Jumper 37013.98,15991.26 r0 top
P410 "COMMS_EN" HDR1X3 35076.89,15213.78 r90 top
P411 "3V3_AUX_EN" HDR1X3 34949.02,15213.78 r90 top
P984 "Jumper" Jumper 37113.98,16191.26 r180 top
P985 "Jumper" Jumper 37229.33,13287.72 r180 top
P986 "Jumper" Jumper 37113.98,17191.26 r180 top
P987 "Jumper" Jumper 37113.98,16691.26 r180 top
P988 "Jumper" Jumper 37113.98,17691.26 r180 top
P989 "Jumper" Jumper 37229.33,14787.72 r180 top
P990 "Jumper" Jumper 37229.33,14287.72 r180 top
P991 "Jumper" Jumper 37229.33,13787.72 r180 top
P992 "Jumper" Jumper3 37227.17,22513.35 r0 top
P993 "Jumper" Jumper3 37157.17,20049.61 r0 top
P994 "Jumper" Jumper 31500,13500 r270 top
P995 "Jumper" Jumper2 31000,16200 r90 top
P996 "Jumper" Jumper3 32400,13600 r270 top
P997 "Jumper" Jumper 31670.45,19654.29 r90 top
P998 "Jumper" Jumper2 31370.45,22554.29 r90 top
P999 "Jumper" Jumper3 32570.45,19754.29 r270 top
R1 "1206 Resistor" 6-0805_M 26600,5560 r90 top
R2 "1206 Resistor" 6-0805_M 26700,5560 r90 top
R3 "1206 Resistor" 6-0805_M 48000,30800 r0 top
R4 "1206 Resistor" 6-0805_M 48000,30700 r0 top
R5 "1206 Resistor" 6-0805_M 51800,25500 r90 top
R6 "1206 Resistor" 6-0805_M 48000,29200 r0 top
R7 "1206 Resistor" 6-0805_M 46400,27900 r180 top
R8 "1206 Resistor" 6-0805_M 46400,28000 r180 top
R9 "1206 Resistor" 6-0805_M 46400,28100 r180 top
SW1 "3.3V" LVSwitcher 34757.17,18549.61 r0 top
SW2 "5V" LVSwitcher 34957.17,21128.35 r0 top
TRX1 "TRX_REGULATOR" TRX_REGULATOR 30970.45,20254.29 r0 top
TRX2 "TRX_REGULATOR" TRX_REGULATOR 31000,14200 r0 top
U1 "PCA9306" TSSOP50P310X90-8N 45800,27950 r0 top

## Footprints (in the part's own frame and the unit in brackets; to place one, negate y for a bottom-side part, rotate by r counter-clockwise, add the part's x,y. Pads: shape width x height; smd on the part's side, far side on the other; paste and mask are expansions set on the pad)
4MM_BANANA [mm] "DELTRON 571-0x00"
  round 3.2 hole 1.8: 1(0,0) 1(15.3,0)
  silkscreen extent -2.5,-5 20.25,5
6-0805_M [mm] "Chip Resistor, Body 2.0x1.2mm, IPC Low Density"
  rect 1.4x1.5 smd: 1(-1,0) 2(1,0)
  silkscreen extent 0,-0.65 0,0.65, body extent -1.07,-0.7 1.07,0.7, height 0.7
BCR [mm]
  round 1.5 hole 0.9: 0(-3.2,77.79) 1(173.96,49.5) 2(173.96,4.5) 3(173.96,54.58) 3(173.96,7.04) 3(173.96,9.58) 3(173.96,12.12) 3(173.96,14.66) 3(173.96,17.2) 3(173.96,19.74) 3(173.96,22.28) 4(176.5,54.58) 4(176.5,22.28) 5(176.5,14.66) 6(176.5,12.12) 7(176.5,9.58) 8(176.5,7.04) 9(176.5,17.2) 10(176.5,19.74) 11(5.5,42.82) 11(5.5,45.36) 11(5.5,47.9) 11(5.5,50.44) 11(5.5,35.2) 11(5.5,37.74) 11(5.5,40.28) 13(5.5,30.12) 13(5.5,32.66) 13(5.5,25.04) 13(5.5,27.58) 14(2.96,50.44) 14(2.96,45.36) 14(2.96,47.9) 14(2.96,40.28) 14(2.96,42.82) 14(2.96,32.66) 14(2.96,35.2) 14(2.96,37.74) 14(2.96,27.58) 14(2.96,30.12) 14(2.96,22.5) 14(2.96,25.04) 15(61.834,17.407) 15(61.834,19.947) 15(61.834,22.487) 16(59.294,17.407) 16(59.294,19.947) 16(59.294,22.487) 17(59.294,14.867) 18(104.834,17.407) 18(104.834,19.947) 18(104.834,22.487) 19(102.294,17.407) 19(102.294,19.947) 19(102.294,22.487) 20(102.294,14.867) 21(18.834,17.407) 21(18.834,19.947) 21(18.834,22.487) 22(16.294,17.407) 22(16.294,19.947) 22(16.294,22.487) 23(16.294,14.867) 24(94.166,67.513) 24(94.166,70.053) 24(94.166,72.593) 25(96.706,67.513) 25(96.706,70.053) 25(96.706,72.593) 26(96.706,75.133) 27(51.166,67.513) 27(51.166,70.053) 27(51.166,72.593) 28(53.706,67.513) 28(53.706,70.053) 28(53.706,72.593) 29(53.706,75.133) 30(137.166,67.513) 30(137.166,70.053) 30(137.166,72.593) 31(139.706,67.513) 31(139.706,70.053) 31(139.706,72.593) 32(139.706,75.133) 34(176.5,52.04) 35(173.96,52.04)
  round 1 hole 0.3: 0(2.5,85.5) 0(2.5,4.5) 0(2.768,86.5) 0(2.768,84.5) 0(2.768,3.5) 0(2.768,5.5) 0(3.5,83.768) 0(3.5,87.232) 0(3.5,6.232) 0(3.5,2.768) 0(4.5,83.5) 0(4.5,87.5) 0(4.5,6.5) 0(4.5,2.5) 0(5.5,83.768) 0(5.5,87.232) 0(5.5,6.232) 0(5.5,2.768) 0(6.232,84.5) 0(6.232,86.5) 0(6.232,3.5) 0(6.232,5.5) 0(6.5,85.5) 0(6.5,4.5) 0(165.5,4.5) 0(165.768,3.5) 0(165.768,5.5) 0(166.5,2.768) 0(166.5,6.232) 0(167.5,2.5) 0(167.5,6.5) 0(168.5,2.768) 0(168.5,6.232) 0(169.232,3.5) 0(169.232,5.5) 0(169.5,4.5) 0(173.5,85.5) 0(173.768,84.5) 0(173.768,86.5) 0(174.5,83.768) 0(174.5,87.232) 0(175.5,83.5) 0(175.5,87.5) 0(176.5,83.768) 0(176.5,87.232) 0(177.232,84.5) 0(177.232,86.5) 0(177.5,85.5)
  round 5 hole 3: 0(4.5,85.5) 0(4.5,4.5) 0(167.5,4.5) 0(175.5,85.5)
  rect 1.5x1.5 hole 0.9: 1(176.5,4.5) 12(-3.2,75.25) 13(5.5,22.5) 15(61.834,14.867) 18(104.834,14.867) 21(18.834,14.867) 24(94.166,75.133) 27(51.166,75.133) 30(137.166,75.133) 33(176.5,49.5)
  silkscreen extent -4.47,0 180,90
Beaglebone [mil]
  rect 60x60 hole 31.5 mask+2.76: A01(2625,-75) B01(2625,-1975) P01(3125,-650)
  round 60 hole 31.5 mask+2.76: A02(2625,-175) A03(2525,-75) A04(2525,-175) A05(2425,-75) A06(2425,-175) A07(2325,-75) A08(2325,-175) A09(2225,-75) A10(2225,-175) A11(2125,-75) A12(2125,-175) A13(2025,-75) A14(2025,-175) A15(1925,-75) A16(1925,-175) A17(1825,-75) A18(1825,-175) A19(1725,-75) A20(1725,-175) A21(1625,-75) A22(1625,-175) A23(1525,-75) A24(1525,-175) A25(1425,-75) A26(1425,-175) A27(1325,-75) A28(1325,-175) A29(1225,-75) A30(1225,-175) A31(1125,-75) A32(1125,-175) A33(1025,-75) A34(1025,-175) A35(925,-75) A36(925,-175) A37(825,-75) A38(825,-175) A39(725,-75) A40(725,-175) A41(625,-75) A42(625,-175) A43(525,-75) A44(525,-175) A45(425,-75) A46(425,-175) B02(2625,-2075) B03(2525,-1975) B04(2525,-2075) B05(2425,-1975) B06(2425,-2075) B07(2325,-1975) B08(2325,-2075) B09(2225,-1975) B10(2225,-2075) B11(2125,-1975) B12(2125,-2075) B13(2025,-1975) B14(2025,-2075) B15(1925,-1975) B16(1925,-2075) B17(1825,-1975) B18(1825,-2075) B19(1725,-1975) B20(1725,-2075) B21(1625,-1975) B22(1625,-2075) B23(1525,-1975) B24(1525,-2075) B25(1425,-1975) B26(1425,-2075) B27(1325,-1975) B28(1325,-2075) B29(1225,-1975) B30(1225,-2075) B31(1125,-1975) B32(1125,-2075) B33(1025,-1975) B34(1025,-2075) B35(925,-1975) B36(925,-2075) B37(825,-1975) B38(825,-2075) B39(725,-1975) B40(725,-2075) B41(625,-1975) B42(625,-2075) B43(525,-1975) B44(525,-2075) B45(425,-1975) B46(425,-2075) P02(3125,-750) P03(3025,-650) P04(3025,-750) P05(2925,-650) P06(2925,-750) P07(2825,-650) P08(2825,-750) P09(2725,-650) P10(2725,-750)
  round 196.85 hole 122.05 mask+2.76: M1(225,-250) M2(225,-1900) M3(2825,-125) M4(2825,-2025)
  silkscreen extent 0,-2150 3400,0
Communications [mm] "Communications"
  round 1.5 hole 0.9: AFSK1_M0(32.192,86.733) AFSK1_M1(29.652,86.733) AFSK1_RXD(34.732,86.733) AFSK2_M0(62.672,86.733) AFSK2_M1(60.132,86.733) AFSK2_RXD(65.212,86.733) AFSK2_TXD(57.592,86.733) DTMF1_Q1(52.512,3.113) DTMF1_Q2(55.052,3.113) DTMF1_Q3(57.592,3.113) DTMF1_Q4(60.132,3.113) DTMF1_ST(62.672,3.113) DTMF2_ES(49.972,3.113) DTMF2_Q1(37.272,3.113) DTMF2_Q2(39.812,3.113) DTMF2_Q3(42.352,3.113) DTMF2_Q4(44.892,3.113) DTMF2_ST(47.432,3.113) GMSK_RX1(83.952,70.923) GMSK_RX2(83.952,65.843) GMSK_TX2(83.952,68.383) GND(3.462,66.013) GND(3.462,68.553) GND(3.462,71.093) GND(3.462,73.633) GND(27.112,3.113) GND(29.652,3.113) GND(86.492,65.843) GND(86.492,68.383) GND(86.492,70.923) GND(86.492,73.463) RX1(6.002,68.553) S0(55.052,86.733) S1(52.512,86.733) S2(49.972,86.733) S3(47.432,86.733) S4(44.892,86.733) S5(42.352,86.733) S6(39.812,86.733) S7(37.272,86.733) TX1(6.002,73.633) TX2(6.002,71.093) VCC(32.192,3.113) VCC(34.732,3.113)
  rect 1.5x1.5 hole 0.9: AFSK1_TXD(27.112,86.733) DTMF1_ES(65.212,3.113) GMSK_TX1(83.952,73.463) RX2(6.002,66.013)
  round 1 hole 0.3: GND(2.377,5.013) GND(2.377,85.013) GND(2.729,3.701) GND(2.729,6.325) GND(2.729,83.701) GND(2.729,86.325) GND(3.69,7.286) GND(3.69,87.286) GND(3.69,2.74) GND(3.69,82.74) GND(5.002,2.388) GND(5.002,7.638) GND(5.002,82.388) GND(5.002,87.638) GND(6.314,2.74) GND(6.314,7.286) GND(6.314,82.74) GND(6.314,87.286) GND(7.275,3.701) GND(7.275,83.701) GND(7.275,6.325) GND(7.275,86.325) GND(7.627,5.013) GND(7.627,85.013) GND(82.375,85) GND(82.377,5.013) GND(82.727,83.688) GND(82.727,86.312) GND(82.729,3.701) GND(82.729,6.325) GND(83.688,87.273) GND(83.688,82.727) GND(83.69,7.286) GND(83.69,2.74) GND(85,82.375) GND(85,87.625) GND(85.002,2.388) GND(85.002,7.638) GND(86.312,82.727) GND(86.312,87.273) GND(86.314,2.74) GND(86.314,7.286) GND(87.273,83.688) GND(87.273,86.312) GND(87.275,3.701) GND(87.275,6.325) GND(87.625,85) GND(87.627,5.013)
  round 7 hole 3.5: GND(5.002,5.013) GND(5.002,85.013) GND(85,85) GND(85.002,5.013)
  silkscreen extent 0,0.01 90,90.01
CSC [mm] "Critical Systems Computer"
  rect 1.65x1.65 hole 1.1: C1_1(68.259,68.588) C2_1(5.267,14.232) C3_1(17.967,7.12)
  round 1.65 hole 1.1: C1_2(68.259,71.128) C1_3(65.719,68.588) C1_4(65.719,71.128) C1_5(63.179,68.588) C1_6(63.179,71.128) C1_7(60.639,68.588) C1_8(60.639,71.128) C1_9(58.099,68.588) C1_10(58.099,71.128) C1_11(55.559,68.588) C1_12(55.559,71.128) C1_13(53.019,68.588) C1_14(53.019,71.128) C1_15(50.479,68.588) C1_16(50.479,71.128) C1_17(47.939,68.588) C1_18(47.939,71.128) C1_19(45.399,68.588) C1_20(45.399,71.128) C1_21(42.859,68.588) C1_22(42.859,71.128) C1_23(40.319,68.588) C1_24(40.319,71.128) C1_25(37.779,68.588) C1_26(37.779,71.128) C1_27(35.239,68.588) C1_28(35.239,71.128) C1_29(32.699,68.588) C1_30(32.699,71.128) C1_31(30.159,68.588) C1_32(30.159,71.128) C1_33(27.619,68.588) C1_34(27.619,71.128) C1_35(25.079,68.588) C1_36(25.079,71.128) C1_37(22.539,68.588) C1_38(22.539,71.128) C1_39(19.999,68.588) C1_40(19.999,71.128) C2_2(7.807,14.232) C2_3(5.267,16.772) C2_4(7.807,16.772) C2_5(5.267,19.312) C2_6(7.807,19.312) C2_7(5.267,21.852) C2_8(7.807,21.852) C2_9(5.267,24.392) C2_10(7.807,24.392) C2_11(5.267,26.932) C2_12(7.807,26.932) C2_13(5.267,29.472) C2_14(7.807,29.472) C2_15(5.267,32.012) C2_16(7.807,32.012) C2_17(5.267,34.552) C2_18(7.807,34.552) C2_19(5.267,37.092) C2_20(7.807,37.092) C2_21(5.267,39.632) C2_22(7.807,39.632) C2_23(5.267,42.172) C2_24(7.807,42.172) C2_25(5.267,44.712) C2_26(7.807,44.712) C2_27(5.267,47.252) C2_28(7.807,47.252) C2_29(5.267,49.792) C2_30(7.807,49.792) C2_31(5.267,52.332) C2_32(7.807,52.332) C2_33(5.267,54.872) C2_34(7.807,54.872) C2_35(5.267,57.412) C2_36(7.807,57.412) C2_37(5.267,59.952) C2_38(7.807,59.952) C2_39(5.267,62.492) C2_40(7.807,62.492) C3_2(17.967,4.58) C3_3(20.507,7.12) C3_4(20.507,4.58) C3_5(23.047,7.12) C3_6(23.047,4.58) C3_7(25.587,7.12) C3_8(25.587,4.58) C3_9(28.127,7.12) C3_10(28.127,4.58) C3_11(30.667,7.12) C3_12(30.667,4.58) C3_13(33.207,7.12) C3_14(33.207,4.58) C3_15(35.747,7.12) C3_16(35.747,4.58) C3_17(38.287,7.12) C3_18(38.287,4.58) C3_19(40.827,7.12) C3_20(40.827,4.58) C3_21(43.367,7.12) C3_22(43.367,4.58) C3_23(45.907,7.12) C3_24(45.907,4.58) C3_25(48.447,7.12) C3_26(48.447,4.58) C3_27(50.987,7.12) C3_28(50.987,4.58) C3_29(53.527,7.12) C3_30(53.527,4.58) C3_31(56.067,7.12) C3_32(56.067,4.58) C3_33(58.607,7.12) C3_34(58.607,4.58) C3_35(61.147,7.12) C3_36(61.147,4.58) C3_37(63.687,7.12) C3_38(63.687,4.58) C3_39(66.227,7.12) C3_40(66.227,4.58)
  round 1 hole 0.3: GND(145,6.95) GND(145.352,5.638) GND(145.352,8.262) GND(146.313,9.223) GND(146.313,4.677) GND(147.625,4.325) GND(147.625,9.575) GND(148.937,4.677) GND(148.937,9.223) GND(149.898,5.638) GND(149.898,8.262) GND(150.25,6.95)
  round 7 hole 3.5: GND(147.625,6.95)
  rect 1.5x1.5 hole 0.9: ISP1(125.877,69.923)
  round 1.5 hole 0.9: ISP2(123.337,69.923) ISP3(120.797,69.923) ISP4(125.877,72.713) ISP5(123.337,72.713) ISP6(120.797,72.713)
  silkscreen extent 0,0 160,75
Filter#1 [mm]
  rect 1x1.4 smd: 1(-1,2) 2(1,0) 2(1,2) 3(-1,0)
  silkscreen extent 0,1.35 0,2.65, body extent -1.1,-0.65 1.1,2.65, height 0.5
Filter#2 [mm]
  rect 1x1.4 smd: 1(-1,0) 1(-1,2) 2(1,2) 3(1,0)
  silkscreen extent 0,1.35 0,2.65, body extent -1.1,-0.65 1.1,2.65, height 0.5
FILTERPWR#1 [mm]
  rect 1.15x1.7 smd: 1(-1.425,2.35) 2(1.425,2.35) 2(1.425,0) 3(-1.425,0)
  silkscreen extent 0,1.7 0,3, body extent -1.63,-0.82 1.62,3.18, height 0.7
FILTERPWR#2 [mm]
  rect 1.15x1.7 smd: 1(-1.425,2.35) 1(-1.425,0) 2(1.425,2.35) 3(1.425,0)
  silkscreen extent 0,1.7 0,3, body extent -1.63,-0.82 1.62,3.18, height 0.7
FILTERSOLA [mm]
  rect 1.45x3.65 smd: 1(-2.175,3.9) 2(2.175,3.9)
  rect 1.7x2.5 smd: 2(2,0) 3(-2,0)
  silkscreen extent 0,2.55 0,5.2, body extent -2.45,2.1 2.45,5.7, height 2
GMSK [mm] "Foot print of GMSK for the flatsat board"
  rect 1.5x2.1 hole 1: 1A(22.15,47.03) 1B(73.05,47.08) 1C(44.59,44.54) 2C(31.77,46.29)
  rect 2.1x1.5 hole 1: 1C(50.53,7.82) 8C(1.97,36.2)
  oval 1.5x2.1 hole 1: 2A(22.15,44.49) 2B(73.05,44.54) 3A(19.61,47.03) 3B(70.51,47.08) 3C(47.13,44.54) 4A(19.61,44.49) 4B(70.51,44.54) 5A(17.07,47.03) 5B(67.97,47.08) 5C(49.67,44.54) 6A(17.07,44.49) 6B(67.97,44.54) 7A(14.53,47.03) 7B(65.43,47.08) 7C(52.21,44.54) 8A(14.53,44.49) 8B(65.43,44.54) 8C(44.59,47.08) 8C(47.13,47.08) 8C(49.67,47.08) 8C(52.21,47.08) 8C(60.35,47.08) 9A(11.99,47.03) 9B(62.89,47.08) 10A(11.99,44.49) 10B(62.89,44.54) 11A(9.45,47.03) 12A(9.45,44.49) 12B(60.35,44.54) ""(34.31,46.29)
  oval 2.1x1.5 hole 1: 2C(1.97,38.74) 3(50.53,5.28) 3C(50.53,2.74) 4(53.07,5.28) 5C(53.07,2.74) 7C(53.07,7.82)
  round 5 hole 3: 8C(2.97,45.74) 8C(3,4) 8C(94.97,3.74) 8C(94.97,45.74)
  round 1 hole 0.3: GND(0.97,45.74) GND(1,4) GND(1.238,46.74) GND(1.238,44.74) GND(1.268,5) GND(1.268,3) GND(1.97,47.472) GND(1.97,44.008) GND(2,5.732) GND(2,2.268) GND(2.97,47.74) GND(2.97,43.74) GND(3,6) GND(3,2) GND(3.97,47.472) GND(3.97,44.008) GND(4,5.732) GND(4,2.268) GND(4.702,44.74) GND(4.702,46.74) GND(4.732,3) GND(4.732,5) GND(4.97,45.74) GND(5,4) GND(92.97,3.74) GND(92.97,45.74) GND(93.238,2.74) GND(93.238,4.74) GND(93.238,44.74) GND(93.238,46.74) GND(93.97,47.472) GND(93.97,2.008) GND(93.97,5.472) GND(93.97,44.008) GND(94.97,47.74) GND(94.97,1.74) GND(94.97,5.74) GND(94.97,43.74) GND(95.97,47.472) GND(95.97,2.008) GND(95.97,5.472) GND(95.97,44.008) GND(96.702,2.74) GND(96.702,4.74) GND(96.702,44.74) GND(96.702,46.74) GND(96.97,3.74) GND(96.97,45.74)
  Top Layer lines w0.3: 50.53,2.74 50.03,2.24
  Keep-Out Layer lines w0.254: 97.97,48.74 -0.03,48.74 -0.03,0.74 97.97,0.74 97.97,48.74
  silkscreen extent -0.03,0.74 97.97,48.94, body extent 0.8,1.57 74.23,48.26, height 7.01
HDR1X3 [mm] "Connector; Header; 3 Position"
  rect 1.5x1.5 hole 0.9: 1(0,0)
  round 1.5 hole 0.9: 2(2.54,0) 3(5.08,0)
  silkscreen extent -1.27,-1.27 6.35,1.27
HDR1X4 [mm] "Connector; Header; 4 Position"
  rect 1.5x1.5 hole 0.9: 1(0,0)
  round 1.5 hole 0.9: 2(2.54,0) 3(5.08,0) 4(7.62,0)
  silkscreen extent -1.27,-1.27 8.89,1.27
Jumper [mm] "Connector; Header; 2 Position"
  round 1.5 hole 0.9: 1(0,0) 2(2.54,0)
Jumper2 [mm] "Connector; Header; 2 Position"
  round 1.5 hole 0.9: 1(0,0) 1(0,-2.54) 2(2.54,-2.54) 2(2.54,0)
Jumper3 [mm] "Connector; Header; 2 Position"
  round 1.5 hole 0.9: 1(0,0) 1(0,-2.54) 1(0,-5.08) 2(2.54,0) 2(2.54,-2.54) 2(2.54,-5.08)
JUMPER4 [mm] "Connector; Header; 2 Position"
  round 1.5 hole 0.9: 1(0,0) 1(0,-2.54) 1(0,-5.08) 1(0,-7.62) 2(2.54,0) 2(2.54,-2.54) 2(2.54,-5.08) 2(2.54,-7.62)
JUMPER6 [mm] "Connector; Header; 2 Position"
  round 1.5 hole 0.9: 1(0,0) 1(0,-2.54) 1(0,-5.08) 1(0,-7.62) 1(0,-10.16) 1(0,-12.7) 2(2.54,-2.54) 2(2.54,0) 2(2.54,-7.62) 2(2.54,-5.08) 2(2.54,-12.7) 2(2.54,-10.16)
LDO [mm] "Low-dropout Regulator"
  round 1.5 hole 0.9: EN1(31.75,40.132) EN2(31.75,28.702) EN3(31.75,17.272) EN4(31.75,5.842) GND(31.75,8.382) GND(31.75,19.812) GND(31.75,31.242) GND(31.75,42.672) VIN(2.54,43.942) VOUT1(31.75,45.212) VOUT2(31.75,33.782) VOUT3(31.75,22.352) VOUT4(31.75,10.922)
  round 1 hole 0.3: GND(1.683,3.81) GND(1.951,2.81) GND(1.951,4.81) GND(2.683,2.078) GND(2.683,5.542) GND(3.683,1.81) GND(3.683,5.81) GND(4.683,2.078) GND(4.683,5.542) GND(5.415,2.81) GND(5.415,4.81) GND(5.683,3.81)
  rect 1.5x1.5 hole 0.9: GND(2.54,41.402) RST1(31.75,37.592) RST2(31.75,26.162) RST3(31.75,14.732) RST4(31.75,3.302)
  round 5 hole 3: GND(3.683,3.81)
  silkscreen extent 0,0 34.9,46.9
LVSwitcher [mm] "Low-Voltage Switching Regulator"
  round 1.5 hole 0.9: EN(46,19.615) GND(3.975,27.235) GND(3.975,29.775) GND(3.975,32.315) GND(46,32.315) GND(46,34.855) GND(46,37.395) SYNC(46,17.075) Vin(3.975,17.075) Vin(3.975,19.615) Vin(3.975,22.155) Vin(3.975,24.695) Vout(46,22.155) Vout(46,24.695) Vout(46,27.235) Vout(46,29.775)
  round 1 hole 0.3: GND(2,4) GND(2,46) GND(2.268,3) GND(2.268,5) GND(2.268,45) GND(2.268,47) GND(3,2.268) GND(3,5.732) GND(3,44.268) GND(3,47.732) GND(4,2) GND(4,6) GND(4,44) GND(4,48) GND(5,2.268) GND(5,5.732) GND(5,44.268) GND(5,47.732) GND(5.732,3) GND(5.732,5) GND(5.732,45) GND(5.732,47) GND(6,4) GND(6,46) GND(44,4) GND(44,46) GND(44.268,3) GND(44.268,5) GND(44.268,45) GND(44.268,47) GND(45,2.268) GND(45,5.732) GND(45,44.268) GND(45,47.732) GND(46,2) GND(46,6) GND(46,44) GND(46,48) GND(47,2.268) GND(47,5.732) GND(47,44.268) GND(47,47.732) GND(47.732,3) GND(47.732,5) GND(47.732,45) GND(47.732,47) GND(48,4) GND(48,46)
  rect 1.5x1.5 hole 0.9: GND(3.975,34.855) PG(46,14.535)
  round 5 hole 3: GND(4,4) GND(4,46) GND(46,4) GND(46,46)
  silkscreen extent 0,0 50,50
"MICROMINIATURE D9" [mil] "GLENAIR MICRO-D9"
  round 60 hole 30: 1(-150,100) 2(-50,100) 3(0,0) 4(50,100) 5(150,100) 6(-200,0) 7(-100,0) 8(100,0) 9(200,0)
  round 120 hole 96: 10(-283,80) 11(283,80)
  silkscreen extent -394,-98 394,453
RCA/4.5-H2 [mm] "Two Conductor Jack (RCA), Right Angle, Thru-Hole, Body 10 x 10 x 13 mm (WxTxH)"
  oval 2x3 hole 1.2: 1A(-4,0)
  oval 3x2 hole 1.2: 2B(-8.496,0)
  silkscreen extent -10.07,-5 9.5,5
SCREW2 [mm]
  round 2.54 hole 1.5: 1(-2.54,0) 2(2.54,0)
  silkscreen extent -5.59,-5.08 5.59,5.08
SCREW3 [mm]
  round 2.54 hole 1.5: 1(-5.08,0) 2(0,0) 3(5.08,0)
  silkscreen extent -8.13,-5.08 8.13,5.08
TO229P990X238-3N [mm] "D-PAK, 3-Pads, Body 6.2x6.7mm (max), IPC Medium Density"
  rect 3.05x1 smd: 1(-4.05,-2.29) 1(-4.05,2.29)
  rect 6.5x5.55 smd: 2(2.4,0)
  silkscreen extent -4.17,-3.35 -1.25,3.46, body extent -2.1,-3.37 4.12,3.37, height 2.38